# Altium PCB Follow Line Robot Controller PCB 2.PcbDoc
Units mil, origin at the board's own origin, x right, y up, seen from the top; angles counter-clockwise.
Board outline 4500 x 4700 mil, 2 copper layers (Top Layer, Bottom Layer); 17 components, 25 nets, 107 pads, 3 vias.
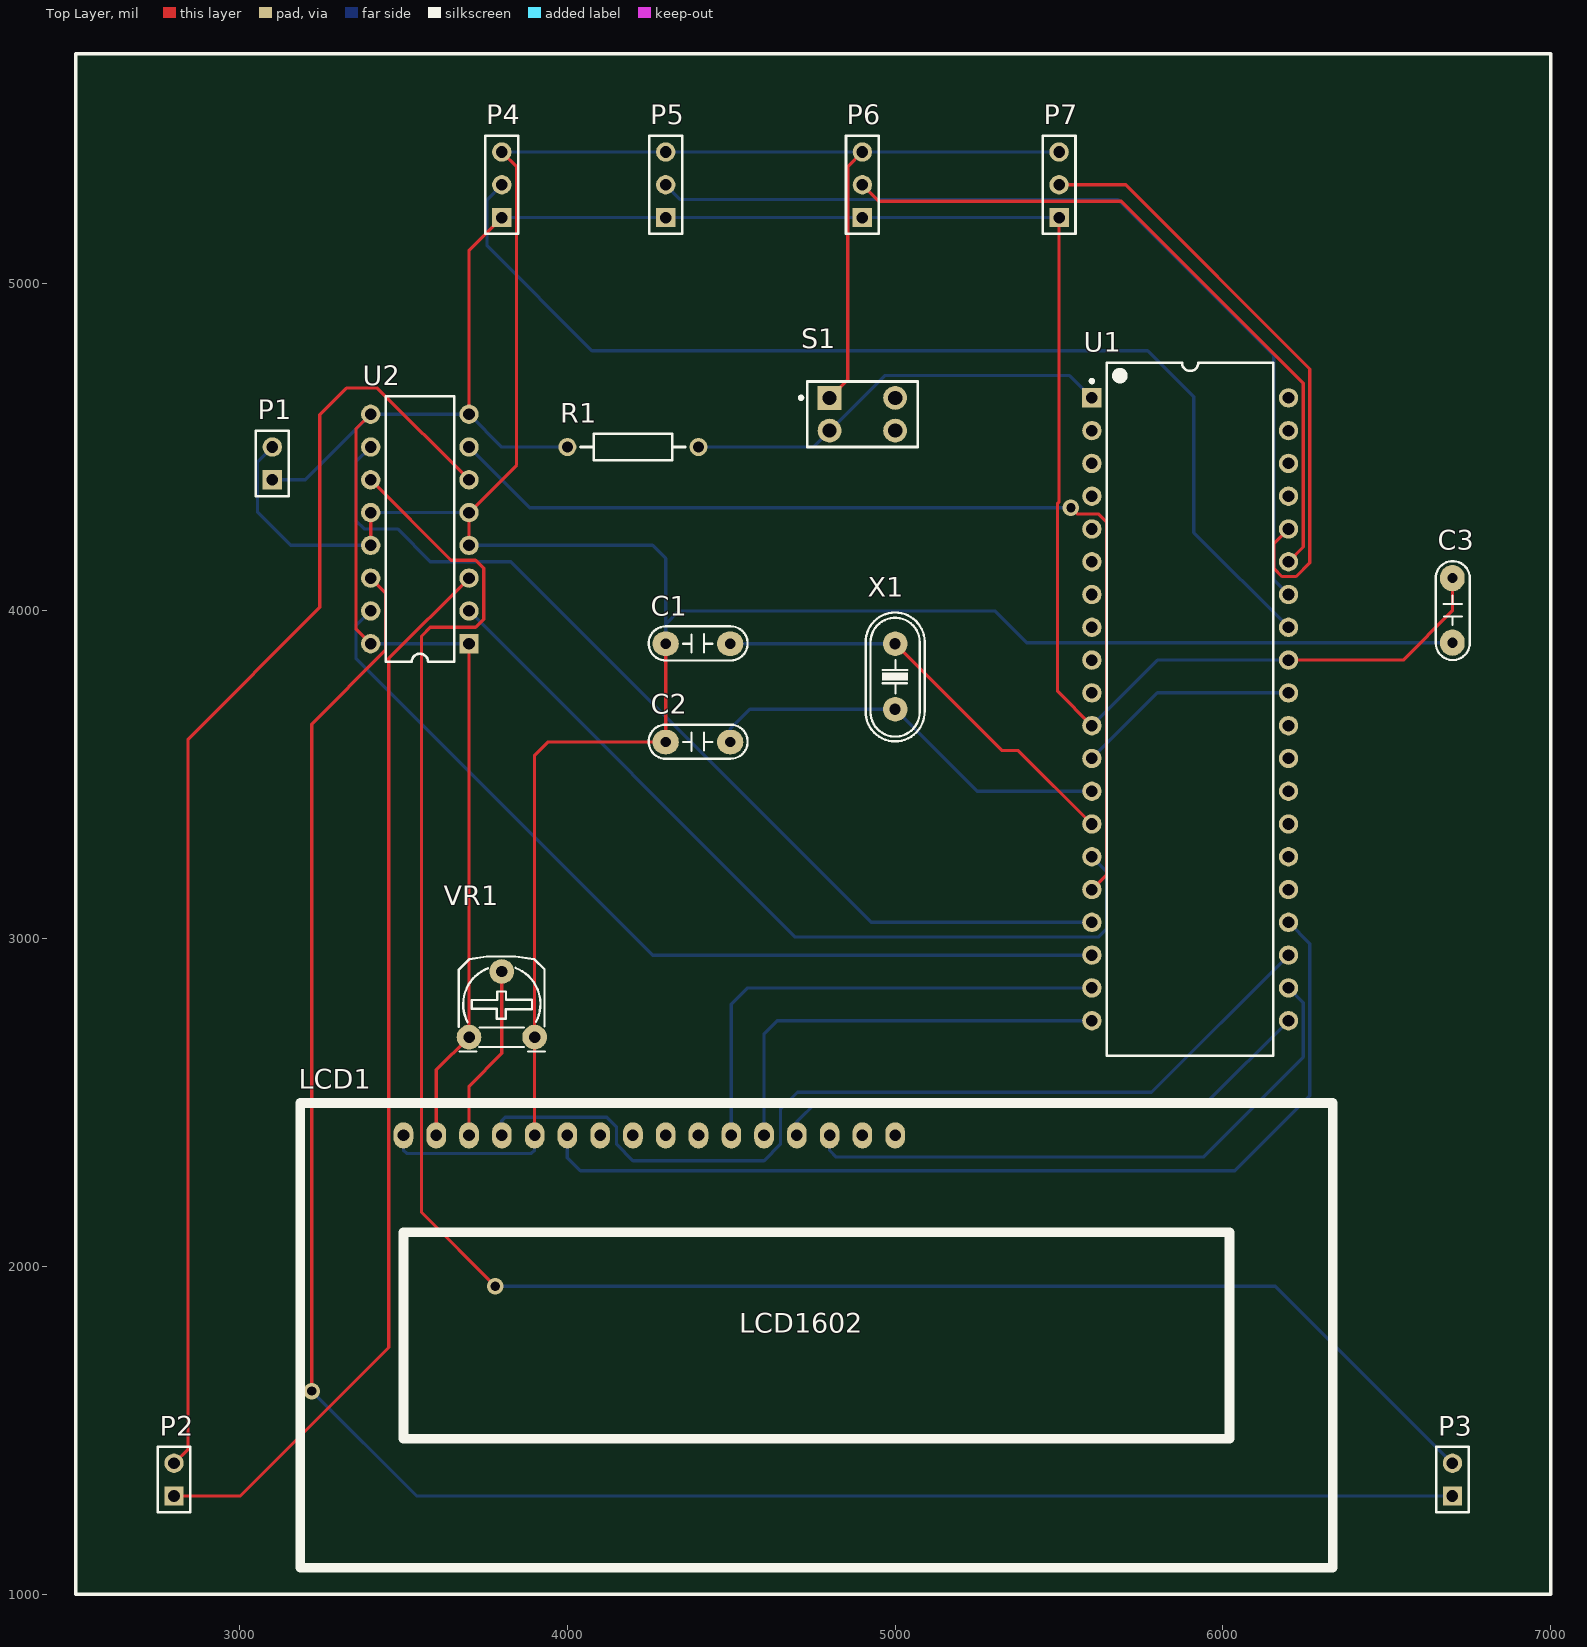
[diagram p0: Top Layer view]
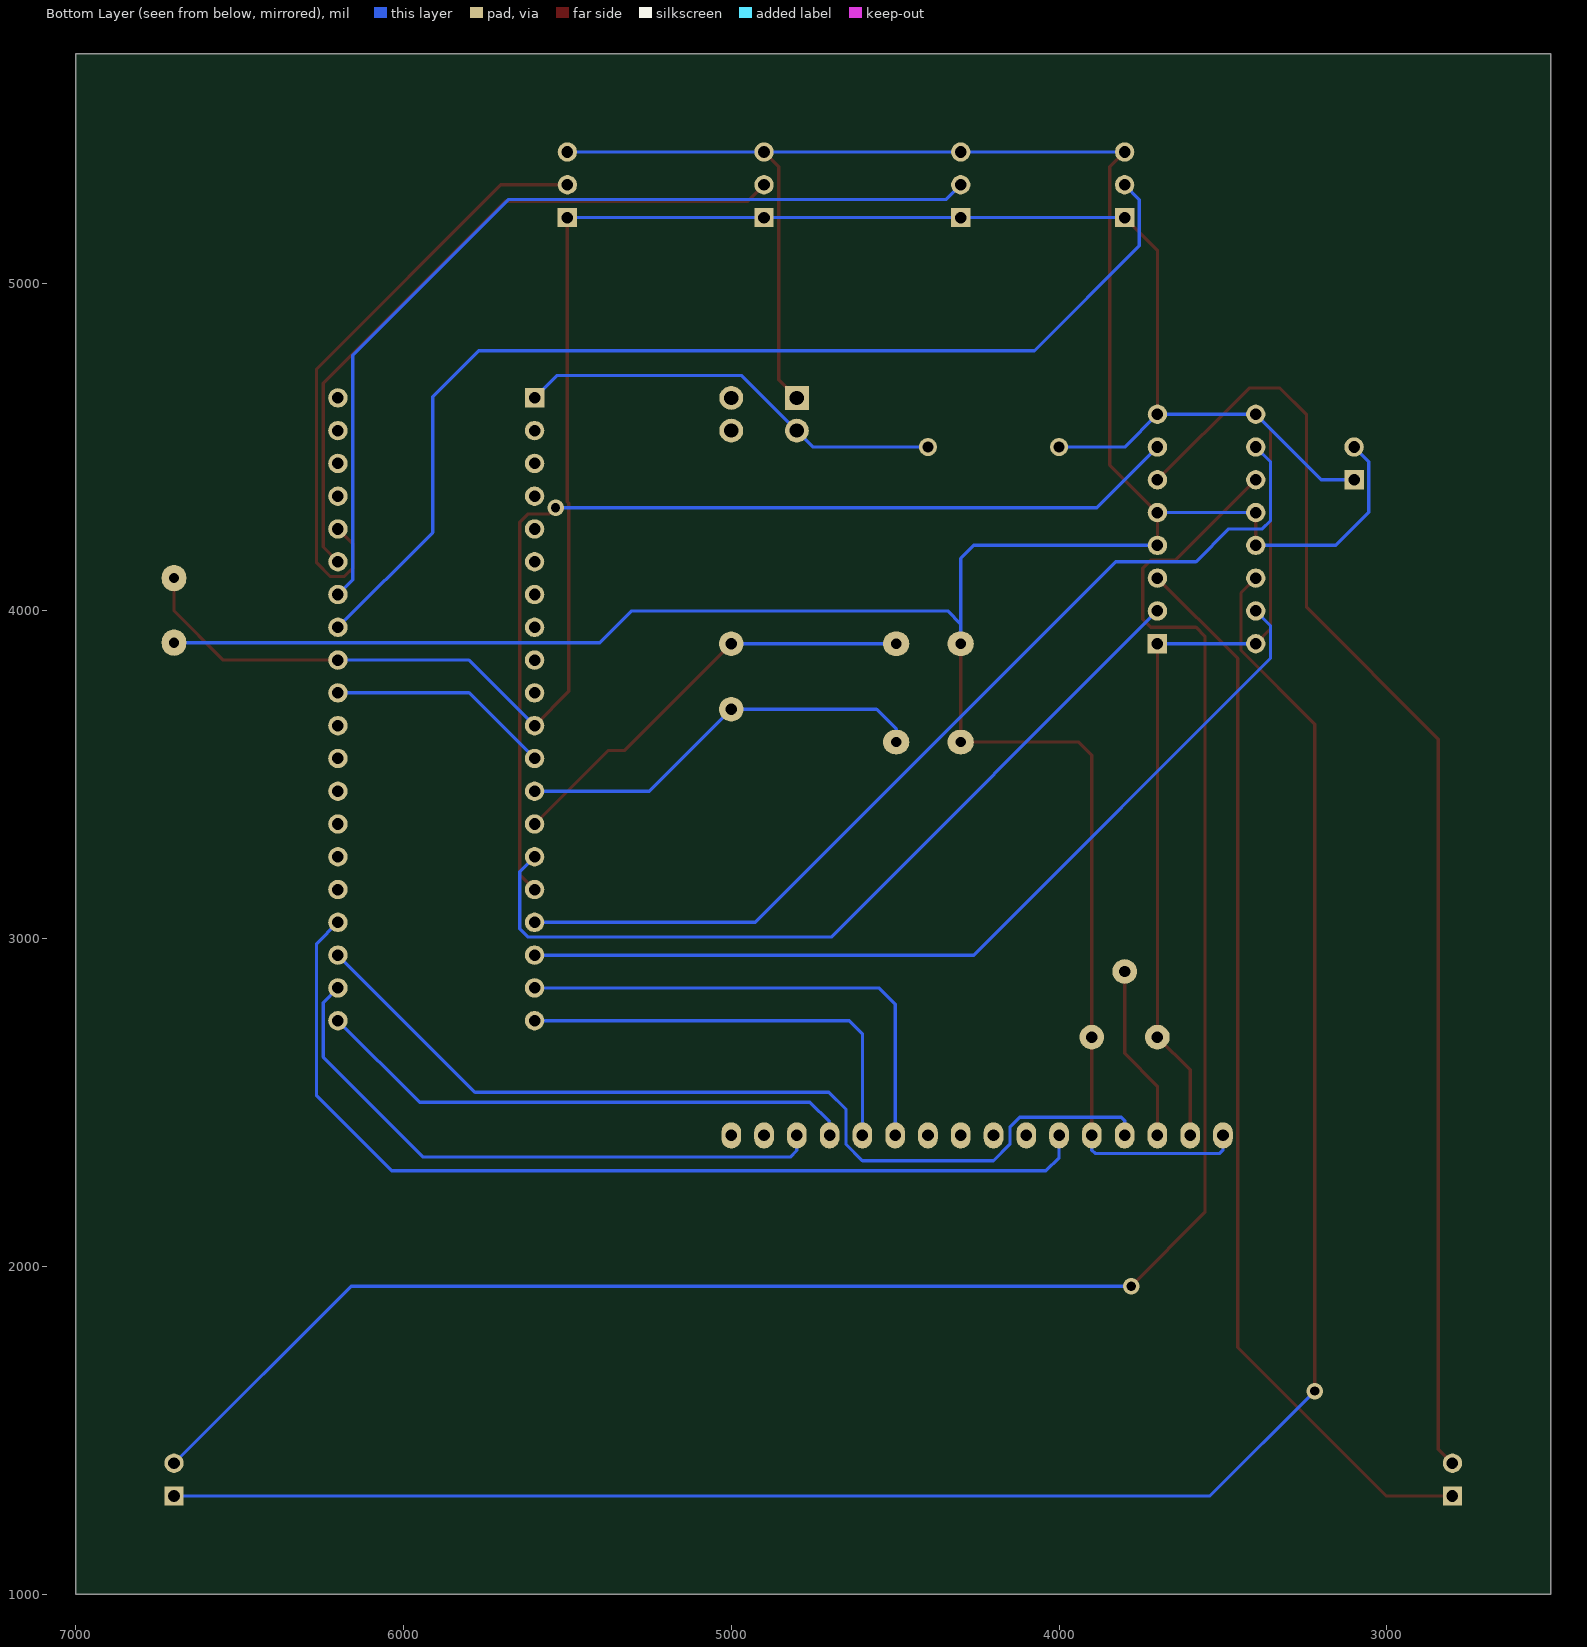
[diagram p1: Bottom Layer view, seen from below]
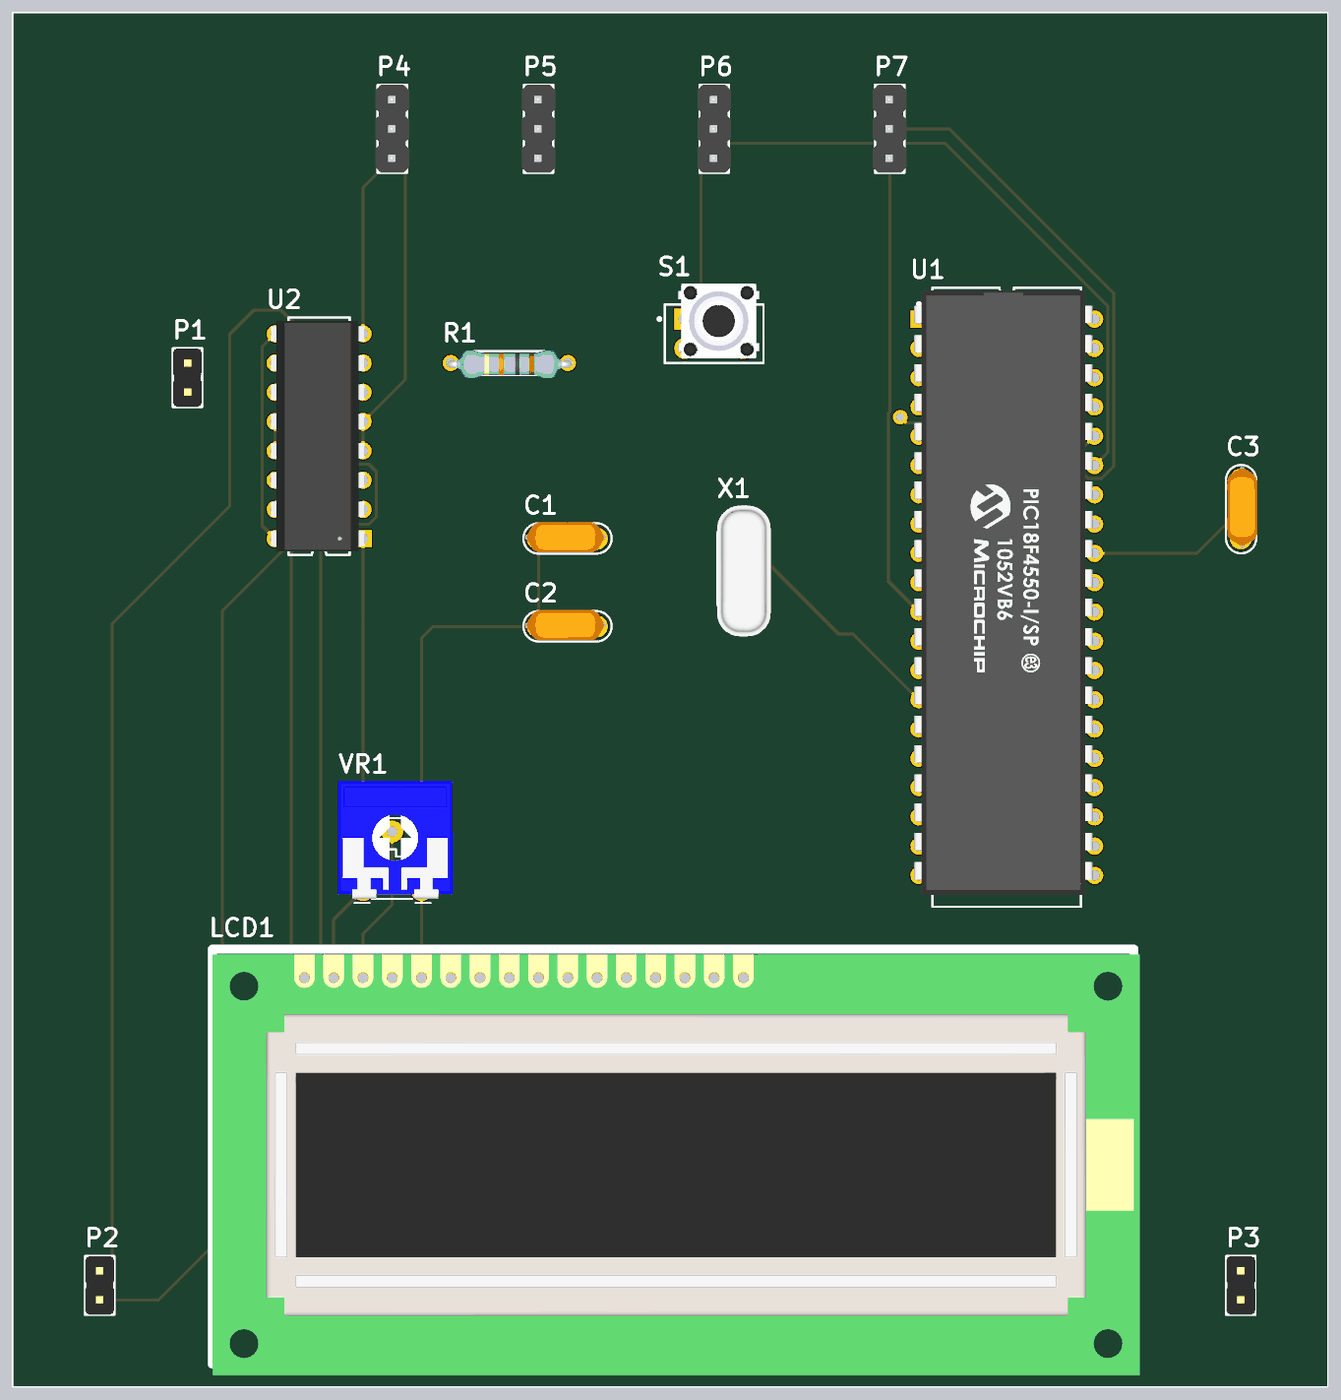
[diagram p2: 3D render of the assembled board from above, using the file's embedded part models]

## Layer stack, top to bottom
Top Solder: solder mask 0.4, Solder Resist, Dk 3.5
Top Layer: signal copper 1.4
Dielectric 1: dielectric 12.6, FR-4, Dk 4.8
Bottom Layer: signal copper 1.4
Bottom Solder: solder mask 0.4, Solder Resist, Dk 3.5

## Board outline
2500,1000 2500,5700 7000,5700 7000,1000

## Design rules (kind name [scope] priority, off if disabled: settings)
Clearance [All] p1: gap=10 ignorepadtopadclearanceinfootprint=FALSE except(0: Arc-Hole Track-Hole SMDPad-Hole THPad-Hole Via-Hole Fill-Hole Poly-Hole Region-Hole Text-Hole)
PolygonConnect [All] p1: connectstyle=Relief reliefconductorwidth=10 reliefentries=4 polygonreliefangle="90 Angle" airgapwidth=10
RoutingVias [All] p1: holewidth=28 width=50 viastyle="Through Hole" minholewidth=28 minwidth=50 maxholewidth=28 maxwidth=50
SolderMaskExpansion [All] p1: expansion=4 istentingtop=FALSE
Width [All] p1: maxlimit=10 minlimit=10 preferedwidth=10
30 further rules are at their usual default settings.

## Components (designator, comment, footprint, x,y, rotation, side; value= is the part's Value field where it differs from the comment)
C1 "Cap Cer" CN3 4496.85,3900 r180 top value=22pF
C2 "Cap Cer" CN3 4496.85,3600 r180 top value=22pF
C3 "Cap Cer" CN3 6700,3903.15 r90 top value=100nF
LCD1 "LCD1602" LCD1602 3500,2400 r0 top
P1 "Vin" HDR1X2 3100,4400 r90 top
P2 "Left Motor" HDR1X2 2800,1300 r90 top
P3 "Right Motor" HDR1X2 6700,1300 r90 top
P4 "Far Left IR" HDR1X3 3800,5200 r90 top
P5 "Left IR" HDR1X3 4300,5200 r90 top
P6 "Right IR" HDR1X3 4900,5200 r90 top
P7 "Far Right IR" HDR1X3 5500,5200 r90 top
R1 "RESET" Res 4200,4500 r180 top value=10K
S1 "SW-DPST" DPST-4 4900,4600 r0 top
U1 "PIC18F4520-E/P" PIC18F-P40 5900,3700 r0 top
U2 "L293D" DIP16 3550,4250 r90 top
VR1 "10K" VR 3700,2700 r0 top value="VR 10K"
X1 "4Mhz" XT2 5000,3800 r90 top

## Footprints (in the part's own frame and the unit in brackets; to place one, negate y for a bottom-side part, rotate by r counter-clockwise, add the part's x,y. Pads: shape width x height; smd on the part's side, far side on the other; paste and mask are expansions set on the pad)
CN3 [mil]
  oval 80x75 hole 31: 1(0,0) 2(196.85,0)
  silkscreen extent -53,-53 249,51, body extent -34,-56 244,46, height 360
DIP16 [mm]
  rect 1.5x1.5 hole 0.9: 1(-8.89,-3.81)
  round 1.5 hole 0.9: 2(-6.35,-3.81) 3(-3.81,-3.81) 4(-1.27,-3.81) 5(1.27,-3.81) 6(3.81,-3.81) 7(6.35,-3.81) 8(8.89,-3.81) 9(8.89,3.81) 10(6.35,3.81) 11(3.81,3.81) 12(1.27,3.81) 13(-1.27,3.81) 14(-3.81,3.81) 15(-6.35,3.81) 16(-8.89,3.81)
  silkscreen extent -10.3,-2.65 10.3,2.65, body extent -9.99,-3.94 10,4.19, height 5.24
DPST-4 [mm]
  rect 1.85x1.85 hole 1.1: 1(-2.54,1.27)
  round 1.85 hole 1.1: 2(-2.54,-1.27) 3(2.54,-1.27) 4(2.54,1.27)
  silkscreen extent -4.88,-2.54 4.28,2.54, body extent -3.73,-2.15 4.53,4.35, height 5
HDR1X2 [mm]
  rect 1.5x1.5 hole 0.9: 1(0,0)
  round 1.5 hole 0.9: 2(2.54,0)
  silkscreen extent -1.27,-1.27 3.81,1.27, body extent -1.27,-1.24 3.81,1.25, height 8.54
HDR1X3 [mm]
  rect 1.5x1.5 hole 0.9: 1(0,0)
  round 1.5 hole 0.9: 2(2.54,0) 3(5.08,0)
  silkscreen extent -1.27,-1.27 6.35,1.27, body extent -1.27,-1.46 6.35,1.46, height 8.51
LCD1602 [mil]
  oval 60x80 hole 35.43: 1(0,0) 2(100,0) 3(200,0) 4(300,0) 5(400,0) 6(500,0) 7(600,0) 8(700,0) 9(800,0) 10(900,0) 11(1000,0) 12(1100,0) 13(1200,0) 14(1300,0) 15(1400,0) 16(1500,0)
  silkscreen extent -315,-1319 2835,98, body extent -315,-1357 2854,80, height 414
PIC18F-P40 [mm]
  rect 1.5x1.5 hole 0.9: 1(-7.62,24.13)
  round 1.5 hole 0.9: 2(-7.62,21.59) 3(-7.62,19.05) 4(-7.62,16.51) 5(-7.62,13.97) 6(-7.62,11.43) 7(-7.62,8.89) 8(-7.62,6.35) 9(-7.62,3.81) 10(-7.62,1.27) 11(-7.62,-1.27) 12(-7.62,-3.81) 13(-7.62,-6.35) 14(-7.62,-8.89) 15(-7.62,-11.43) 16(-7.62,-13.97) 17(-7.62,-16.51) 18(-7.62,-19.05) 19(-7.62,-21.59) 20(-7.62,-24.13) 21(7.62,-24.13) 22(7.62,-21.59) 23(7.62,-19.05) 24(7.62,-16.51) 25(7.62,-13.97) 26(7.62,-11.43) 27(7.62,-8.89) 28(7.62,-6.35) 29(7.62,-3.81) 30(7.62,-1.27) 31(7.62,1.27) 32(7.62,3.81) 33(7.62,6.35) 34(7.62,8.89) 35(7.62,11.43) 36(7.62,13.97) 37(7.62,16.51) 38(7.62,19.05) 39(7.62,21.59) 40(7.62,24.13)
  silkscreen extent -7.74,-26.85 6.45,26.85, body extent -8.05,-25.83 7.45,26.62, height 5.7
Res [mm]
  round 1.4 hole 0.85: 1(-5.08,0) 2(5.08,0)
  silkscreen extent -4.06,-1.02 4.06,1.02, body extent -5.38,-1.1 5.38,1.3, height 2.41
VR [mil]
  round 75 hole 35: 1(0,0) 2(100,200) 3(200,0)
  silkscreen extent -31,-44 231,246, body extent -87,-30 307,372, height 165
XT2 [mil]
  round 75 hole 34: 1(-100,0) 2(100,0)
  silkscreen extent -198,-90 195,90, body extent -233,-93 213,90, height 138

## Part data
C1 C2 C3: library part CN3, "Cap np W0.3"
P1 P2 P3: library part "Header 2", "Header, 2-Pin", LatestRevisionDate=17-Jul-2002, LatestRevisionNote="Re-released for DXP Platform.", Publisher="Altium Limited"
P4 P5 P6 P7: library part "Header 3", "Header, 3-Pin", LatestRevisionDate=17-Jul-2002, LatestRevisionNote="Re-released for DXP Platform.", Publisher="Altium Limited"
R1: library part Res2, "Resistor", LatestRevisionDate=17-Jul-2002, LatestRevisionNote="Re-released for DXP Platform.", PackageDescription="Axial Device, Thru-Hole; 2 Leads; 0.4 in Pin Spacing", PackageReference=AXIAL-0.4, Published=8-Jun-2000, Publisher="Altium Limited"
S1: "Double-Pole, Single-Throw Switch", LatestRevisionDate=17-Jul-2002, LatestRevisionNote="Re-released for DXP Platform.", PackageDescription="Switch; 4 Leads", PackageReference=DPST-4, Published=24-Mar-1999, Publisher="Altium Limited"
U1: "Enhanced Flash Microcontroller with 10-Bit A/D and nanoWatt Technology, 32K Flash, 40-Pin PDIP, Extended Temperature Range", Supplier Part Number 1=PIC18F4520-E/P-ND, ComponentLink1Description=Datasheet, ComponentLink1URL=http://ww1.microchip.com/downloads/en/DeviceDoc/39631E.pdf, ComponentLink2Description="Packaging Specification", ComponentLink2URL=http://www.microchip.com/stellent/groups/techpub_sg/documents/packagingspec/en012702.pdf, ComponentLink3Description="Microchip.com Home", ComponentLink3URL=http://www.microchip.com/, DatasheetVersion="revE, Oct-2008", LatestRevisionDate=02-Dec-2009, LatestRevisionNote="Updated to datasheet revision E, Oct-2008", PackageDescription="40-Lead Plastic Dual In-Line (P) - 600 mil Body [PDIP]", PackageReference=PDIP600-P40, PackageVersion="revBB, Aug-2009", Published=29-Jan-2009, Publisher="Altium Limited", Supplier 1=Digi-Key
U2: "Push-Pull Four Channel Driver With Diode", ComponentLink1Description="Manufacturer Link", ComponentLink1URL=http://www.st.com/, ComponentLink2Description=Datasheet, ComponentLink2URL=http://www.st.com/stonline/products/literature/ds/1330/l293d.pdf, DatasheetVersion=Jun-1996, LatestRevisionDate=06-Jun-2005, LatestRevisionNote="Stylized 3D Model Added.", PackageDescription="DIP; 16 Leads; Row Spacing 7.62 mm; Pitch 2.54 mm", PackageReference=DIP16, PackageVersion=Apr-1996, Published=8-Jun-2000, Publisher="Altium Limited"
VR1: library part VR1, "Var Resistor"
X1: library part XT2, "Crystal For all Crystal 2pin."

## Via types
v1: diameter 50, hole 28, Top Layer to Bottom Layer, 3 vias

## Nets (pads, with @x,y where several pads share a name; then routed paths per layer and width w, separated by ;. In a path a pad name is that pad's centre, name@x,y a point inside that pad or via, vN(x,y) a via of type N, cw(c..) or ccw(c..) an arc to the next point about the centre after c; other vN are vias at no path point)
GND: C1.2 C2.2 C3.1 LCD1.1 LCD1.5 P1.2 P4.3 P5.3 P6.3 P7.3 S1.1 U2.4 U2.5 U2.12 U2.13 VR1.3 | length 10482.7
  Top Layer w10: U2.13 U2.12 ; U2.4 U2.5 3845,4445 3845,5355 P4.3 ; LCD1.5 VR1.3 3900,3560 3940,3600 C2.2 C1.2 ; S1.1 4855,4705 4855,5355 P6.3
  Bottom Layer w10: P1.2 3055,4455 3055,4301 3156,4200 U2.13 ; U2.12 U2.5 ; LCD1.1 3500,2355 3510,2345 3890,2345 3900,2355 LCD1.5 ; U2.4 4260,4200 4300,4160 4300,3960 ; P4.3 P5.3 P6.3 P7.3 ; C1.2 4300,3960 ; C3.1 5400.85,3903.15 5304,4000 4340,4000 4300,3960
Input1: U1.15 U2.2 | length 2606.1
  Bottom Layer w10: U2.2 4695,3005 5620,3005 5645,3030 5645,3205 U1.15
Input2: U1.16 U2.7 | length 3179.5
  Top Layer w10: v1(5536,4315) 5555,4296 5620,4296 5645,4271 5645,3195 U1.16
  Bottom Layer w10: U2.7 3885,4315 v1(5536,4315)
Input3: U1.17 U2.10 | length 2996.1
  Bottom Layer w10: U2.10 3355,4455 3355,4275 3380,4250 3482,4250 3582,4150 3827,4150 4927,3050 U1.17
Input4: U1.18 U2.15 | length 2783.5
  Bottom Layer w10: U2.15 3355,3955 3355,3855 4260,2950 U1.18
IRSensor1: P4.2 U1.33 | length 3374.3
  Bottom Layer w10: P4.2 3755,5255 3755,5114 4075,4794 5770,4794 5911,4653 5911,4239 U1.33
IRSensor2: P5.2 U1.34 | length 2819
  Bottom Layer w10: P5.2 4345,5255 5680,5255 6155,4780 6155,4095 U1.34
IRSensor3: P6.2 U1.35 | length 2159.2
  Top Layer w10: P6.2 4950,5250 5690,5250 6245,4695 6245,4195 U1.35
IRSensor4: P7.2 U1.36 | length 1865.2
  Top Layer w10: P7.2 5703,5300 6265,4738 6265,4147 6223,4105 6180,4105 6155,4130 6155,4205 U1.36
NetLCD1_3: LCD1.3 VR1.2 | length 541.4
  Top Layer w10: LCD1.3 3700,2550 3800,2650 VR1.2
OSC1: C2.1 U1.13 X1.1 | length 1271.6
  Bottom Layer w10: C2.1 4496.85,3640 4556.85,3700 X1.1 5250,3450 U1.13
OSC2: C1.1 U1.14 X1.2 | length 1331
  Top Layer w10: X1.2 5326,3574 5376,3574 U1.14
  Bottom Layer w10: C1.1 X1.2
Output1: P2.1 U2.3 | length 3291.1
  Top Layer w10: P2.1 3002,1300 3455,1753 3455,3855 U2.3
Output2: P2.2 U2.6 | length 3987.9
  Top Layer w10: P2.2 2843,1443 2843,3609 3245,4011 3245,4599 3326,4680 3420,4680 U2.6
Output3: P3.1 U2.14 | length 6204.4
  Top Layer w10: v1(3220,1620) 3220,3655 3445,3880 3445,4055 U2.14
  Bottom Layer w10: v1(3220,1620) 3540,1300 P3.1
Output4: P3.2 U2.11 | length 6043.3
  Top Layer w10: U2.11 3645,4155 3720,4155 3745,4130 3745,3975 3720,3950 3582,3950 3555,3923 3555,2165 v1(3780,1940)
  Bottom Layer w10: v1(3780,1940) 6160,1940 P3.2
RD0: LCD1.11 U1.19 | length 1520.7
  Bottom Layer w10: LCD1.11 4500,2800 4550,2850 U1.19
RD1: LCD1.12 U1.20 | length 1326.6
  Bottom Layer w10: LCD1.12 4600,2710 4640,2750 U1.20
RD2: LCD1.13 U1.21 | length 1669
  Bottom Layer w10: LCD1.13 4700,2441 4760,2501 5951,2501 U1.21
RD3: LCD1.14 U1.22 | length 1855.3
  Bottom Layer w10: LCD1.14 4800,2354 4820,2334 5940,2334 6245,2639 6245,2805 U1.22
RD4: LCD1.4 U1.23 | length 2856.7
  Bottom Layer w10: LCD1.4 3800,2445 3810,2455 4120,2455 4150,2425 4150,2373 4200,2323 4600,2323 4650,2373 4650,2480 4702,2532 5782,2532 U1.23
RD5: LCD1.6 U1.24 | length 3000.3
  Bottom Layer w10: LCD1.6 4000,2332 4040,2292 6036,2292 6265,2521 6265,2985 U1.24
Reset1: R1.1 S1.2 U1.1 | length 1318.5
  Bottom Layer w10: R1.1 4750,4500 S1.2 4968,4718 5532,4718 U1.1
VDD1: C3.2 LCD1.2 P1.1 P4.1 P5.1 P6.1 P7.1 R1.2 U1.11 U1.32 U2.1 U2.8 U2.9 U2.16 VR1.1 | length 8884.5
  Top Layer w10: U2.16 3355,3945 3355,4555 U2.9 ; LCD1.2 3600,2600 VR1.1 U2.1 ; U2.8 3700,5100 P4.1 ; P7.1 5500,4333 5495.47,4328.47 5495.47,3754.53 U1.11 ; U1.32 6550,3850 6700,4000 C3.2
  Bottom Layer w10: P1.1 3200,4400 U2.9 U2.8 3800,4500 R1.2 ; U2.16 U2.1 ; P4.1 P5.1 P6.1 P7.1 ; U1.11 5800,3850 U1.32
VSS1: U1.12 U1.31 | length 682.8
  Bottom Layer w10: U1.12 5800,3750 U1.31
pads on no net: LCD1.7 LCD1.8 LCD1.9 LCD1.10 LCD1.15 LCD1.16 S1.3 S1.4 U1.2 U1.3 U1.4 U1.5 U1.6 U1.7 U1.8 U1.9 U1.10 U1.25 U1.26 U1.27 U1.28 U1.29 U1.30 U1.37 U1.38 U1.39 U1.40

## Silkscreen, mask and mechanical layers (free items; w line width, h text height)
Top Overlay:
  the board outline again, w10